# EAGLE board 3D printer Schematic (EAGLE 9.6.2)
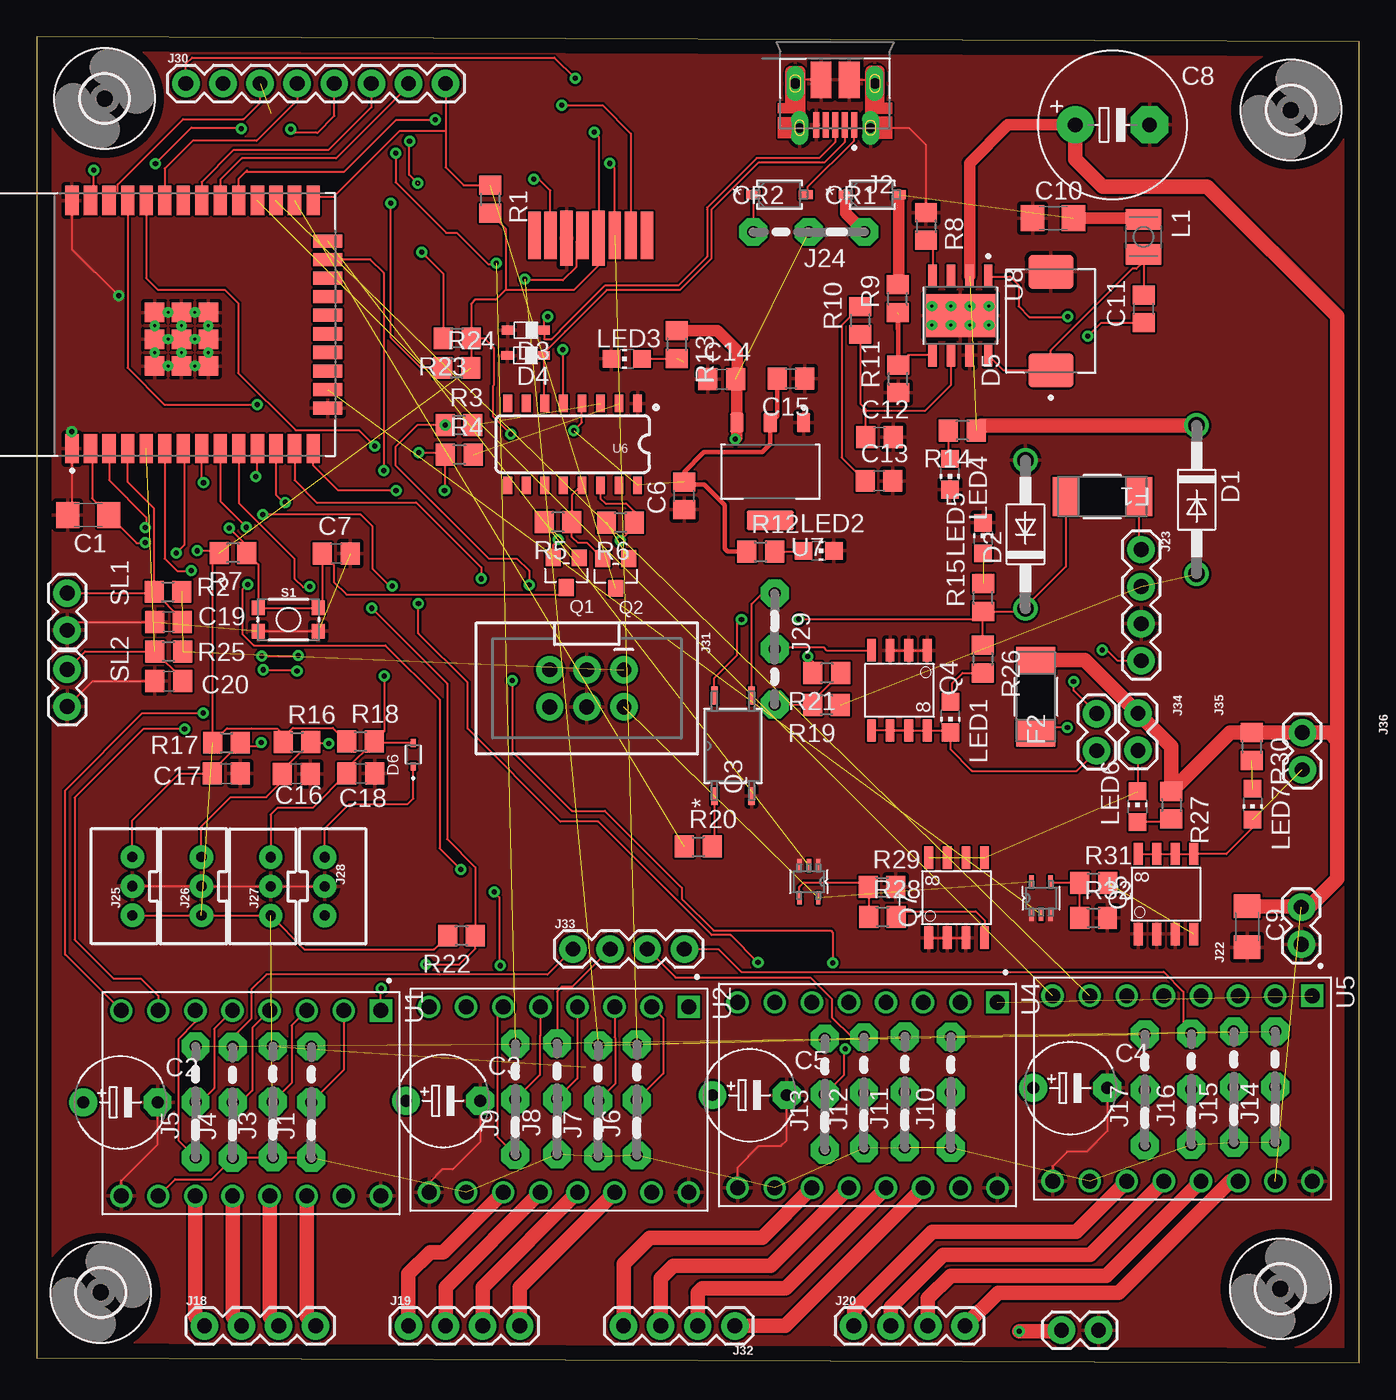
[diagram p0: board, top side]
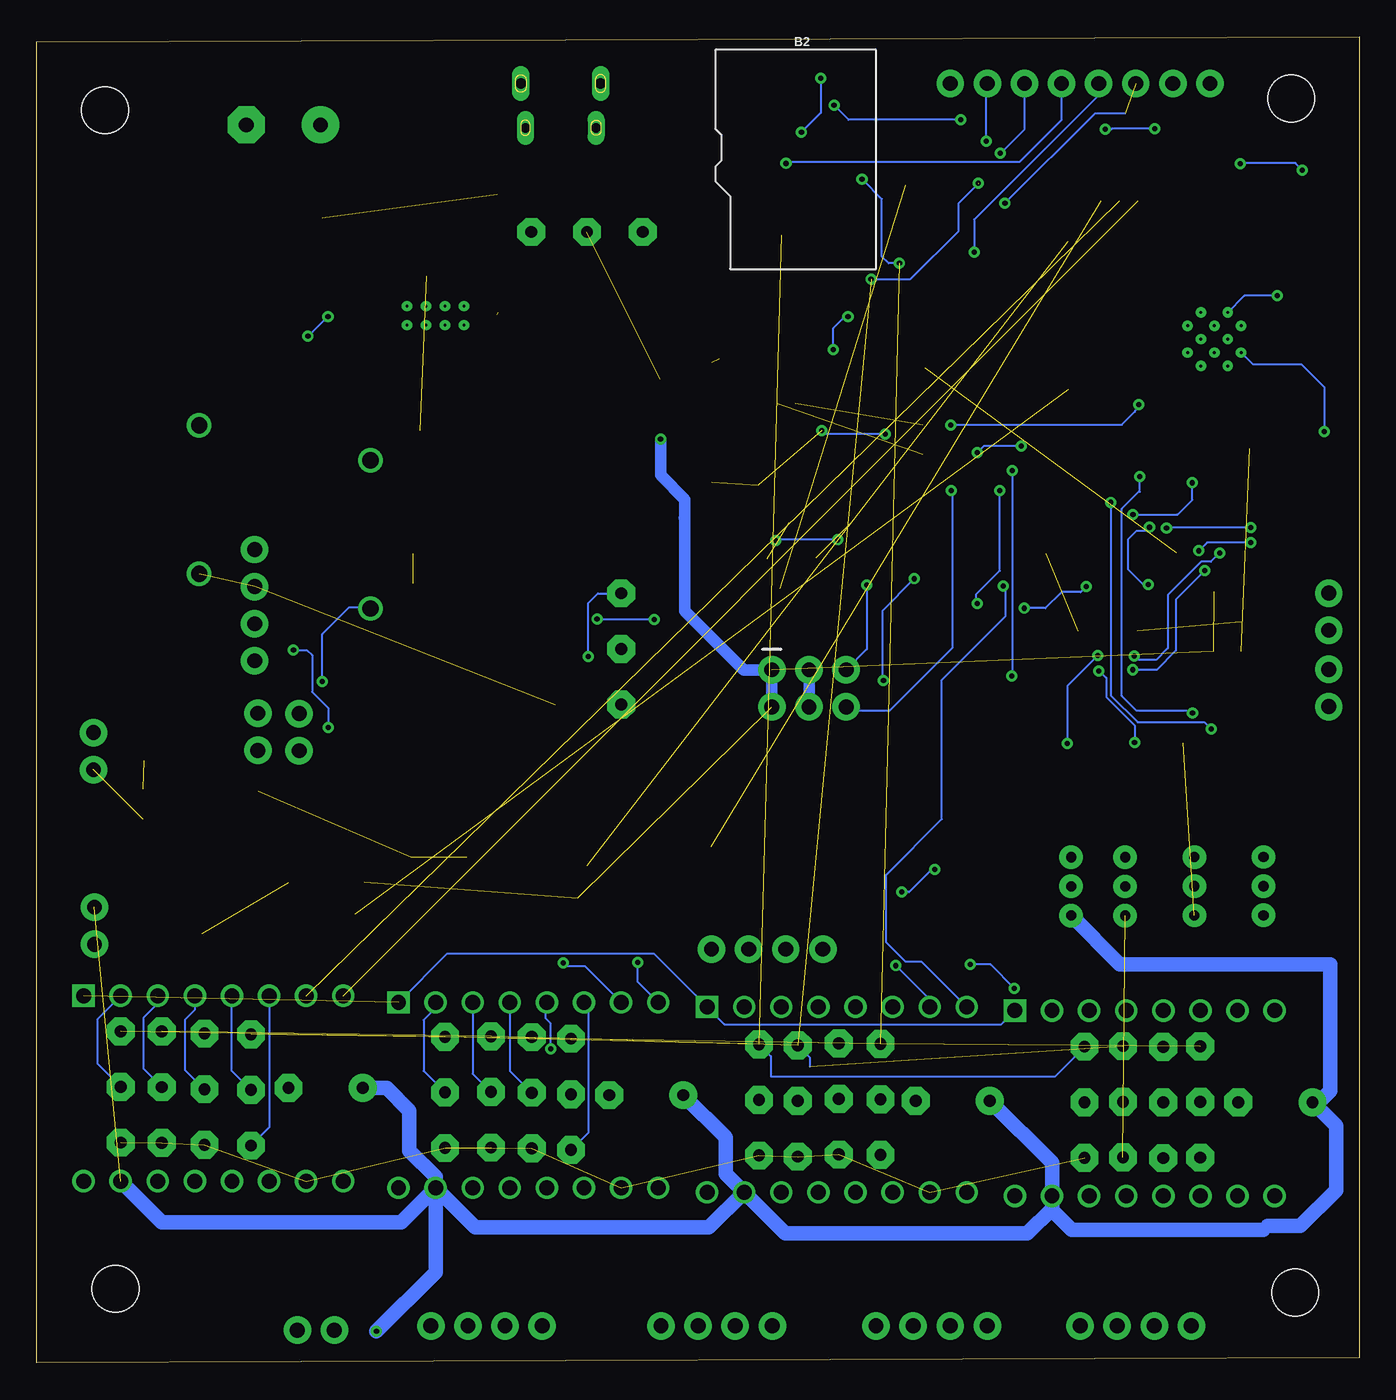
[diagram p1: board, bottom side, seen from below]

Size 90.57 x 90.85 mm. Coordinates in mm from the lower left corner, seen from the top.
Outline: 0,0.35 90.57,0 90.57,90.5 0,90.85 0,0.35
Copper layers (1*16): Top 0.035mm / dielectric 1.5mm / Bottom 0.035mm
Design rules "default": minimum track width 6mil, minimum drill 0.35mm, track to track 6mil, track to pad 6mil, pad to pad 6mil, via to via 6mil, smd to smd 6mil, copper to edge 40mil, drill to drill 6mil, minimum pad ring 10mil, minimum via ring 8mil, stop-mask expansion 4mil, vias tented up to drill 0mil, thermal gap 10mil

## Footprints (pad centres in the part's own frame; a part is rotated, then mirrored left to right if it is on the bottom)
DCK5_TEX = smd 0.851 x 0.305: 1 -1.124,0.65; 2 -1.124,0; 3 -1.124,-0.65; 4 1.124,-0.65; 5 1.124,0.65
MICRO-SDCARD = smd 0.85 x 3.25 bottom: CD/DAT3 -2.52,-5.32; CLK 0.78,-5.32; CMD -1.42,-5.32; DAT0 2.98,-5.32; DAT1 4.08,-5.32; DAT2 -3.62,-5.32 | smd 0.85 x 3.75 bottom: GND 1.88,-5.52; VCC -0.32,-5.52
C1206 = smd 1.6 x 1.8: 1 -1.4,0; 2 1.4,0
E5-6 = drill 0.813 pad 1.905: + -2.54,0 | drill 0.813 pad 1.905 octagon: - 2.54,0
C0805 = smd 1.3 x 1.5: 1 -0.95,0; 2 0.95,0
E5-10,5 = drill 1.016 pad 2.54: + -2.54,0 | drill 1.016 pad 2.54 octagon: - 2.54,0
CR_19WLC_LTO = smd 0.965 x 0.61: 1 -1.803,0; 2 1.803,0
DO41-10 = drill 1.118: A 5.08,0; C -5.08,0
SOD323 = smd 0.8 x 0.6: A 1.25,0; C -1.25,0
DIOM6959X245N = smd 2.33 x 3.07: A 3.365,0; C -3.365,0
SODFL1608X70N = smd 0.53 x 0.4: A 0.8,0; C -0.8,0
0453SERIES_LTF = smd 1.803 x 2.692: 1 -2.502,0; 2 2.502,0
3,2 = hole 3.2: 0,0
04C = drill 0.813 pad 1.905 octagon: 1 -1.905,0; 2 1.905,0; 3 5.715,0
AMPHENOL_10103594-0001LF = smd 0.4 x 1.75: 1 -1.3,2.825; 2 -0.65,2.825; 3 0,2.825; 4 0.65,2.825; 5 1.3,2.825 | drill 0.65 pad 0.73 long: 6 -2.425,3.03; 7 2.425,3.03 | drill 0.7 pad 1.2 long: 8 -2.725,0; 9 2.725,0 | smd 1.05 x 2.1 bottom: 10 -2.425,3.03; 11 2.425,3.03 | smd 1.425 x 2.5: S1 -0.963,-0.25; S2 0.963,-0.25
1X04 = drill 1.016 pad 1.88: 1 0,0; 2 2.54,0; 3 5.08,0; 4 7.62,0
1X02 = drill 1.016 pad 1.88: 1 0,0; 2 2.54,0
JST-3-PTH-VERT = drill 0.7 pad 1.6: 1 -2,-0.55; 2 0,-0.55; 3 2,-0.55
1X08 = drill 1.016 pad 1.88: 1 0,0; 2 2.54,0; 3 5.08,0; 4 7.62,0; 5 10.16,0; 6 12.7,0; 7 15.24,0; 8 17.78,0
2X3-SHROUDED = drill 1.016 pad 1.88: 1 -1.27,2.54; 2 1.27,2.54; 3 -1.27,0; 4 1.27,0; 5 -1.27,-2.54; 6 1.27,-2.54
L2825P = smd 1.4 x 2.4: 1 -1.2,0; 2 1.2,0
CHIP-LED0805 = smd 1.2 x 1.2: A 0,-1.05; C 0,1.05
SOT-23 = smd 1.016 x 1.143: 1 -0.889,-1.016; 2 0.889,-1.016; 3 0,1.016
4PIN_SO6_TOS = smd 1.219 x 0.457: 1 -3.442,1.27; 3 -3.442,-1.27; 4 3.442,-1.27; 6 3.442,1.27
SO-8 = smd 1.524 x 0.61: 1 -2.743,1.905; 2 -2.743,0.635; 3 -2.743,-0.635; 4 -2.743,-1.905; 5 2.743,-1.905; 6 2.743,-0.635; 7 2.743,0.635; 8 2.743,1.905
R0805 = smd 1.3 x 1.5: 1 -0.95,0; 2 0.95,0
TACTILE_SWITCH_SMD_4.6X2.8MM = smd 0.9 x 1: 1 -2.05,-0.8; 2 2.05,-0.8; 3 2.05,0.8; 4 -2.05,0.8
MODULE_A4988_STEPPER_MOTOR_DRIVER_CARRIER = drill 1.02 square: 1 -6.35,8.89 | drill 1.02: 2 -6.35,6.35; 3 -6.35,3.81; 4 -6.35,1.27; 5 -6.35,-1.27; 6 -6.35,-3.81; 7 -6.35,-6.35; 8 -6.35,-8.89; 9 6.35,-8.89; 10 6.35,-6.35; 11 6.35,-3.81; 12 6.35,-1.27; 13 6.35,1.27; 14 6.35,3.81; 15 6.35,6.35; 16 6.35,8.89
MODULE_ESP32-WROOM-32D = smd 2 x 0.9: 1 -8.5,5.26; 2 -8.5,3.99; 3 -8.5,2.72; 4 -8.5,1.45; 5 -8.5,0.18; 6 -8.5,-1.09; 7 -8.5,-2.36; 8 -8.5,-3.63; 9 -8.5,-4.9; 10 -8.5,-6.17; 11 -8.5,-7.44; 12 -8.5,-8.71; 13 -8.5,-9.98; 14 -8.5,-11.25; 25 8.5,-11.25; 26 8.5,-9.98; 27 8.5,-8.71; 28 8.5,-7.44; 29 8.5,-6.17; 30 8.5,-4.9; 31 8.5,-3.63; 32 8.5,-2.36; 33 8.5,-1.09; 34 8.5,0.18; 35 8.5,1.45; 36 8.5,2.72; 37 8.5,3.99; 38 8.5,5.26 | smd 0.9 x 2: 15 -5.715,-12.25; 16 -4.445,-12.25; 17 -3.175,-12.25; 18 -1.905,-12.25; 19 -0.635,-12.25; 20 0.635,-12.25; 21 1.905,-12.25; 22 3.175,-12.25; 23 4.445,-12.25; 24 5.715,-12.25 | smd 1.33 x 1.33: 39_1 -2.835,-0.405; 39_2 -1,-0.405; 39_3 0.835,-0.405; 39_4 -2.835,-2.24; 39_5 -1,-2.24; 39_6 0.835,-2.24; 39_7 -2.835,-4.075; 39_8 -1,-4.075; 39_9 0.835,-4.075 | drill 0.2 pad 0.3: 39_10 -1.917,-0.405; 39_11 -0.083,-0.405; 39_12 -2.835,-1.323; 39_13 -1,-1.323; 39_14 0.835,-1.323; 39_15 -1.917,-2.24; 39_16 -0.083,-2.24; 39_17 -2.835,-3.158; 39_18 -1,-3.158; 39_19 0.835,-3.158; 39_20 -1.917,-4.075; 39_21 -0.083,-4.075
SO016 = smd 0.6 x 1.2: 1 -4.445,-2.8; 2 -3.175,-2.8; 3 -1.905,-2.8; 4 -0.635,-2.8; 5 0.635,-2.8; 6 1.905,-2.8; 7 3.175,-2.8; 8 4.445,-2.8; 9 4.445,2.8; 10 3.175,2.8; 11 1.905,2.8; 12 0.635,2.8; 13 -0.635,2.8; 14 -1.905,2.8; 15 -3.175,2.8; 16 -4.445,2.8
SOT229P700X180-4N = smd 0.93 x 1.31: 1 -2.29,-3.345; 2 0,-3.345; 3 2.29,-3.345 | smd 3.24 x 1.31: 4 0,3.345
VREG_LM5017MR/NOPB = smd 1.55 x 0.6: 1 -2.7,1.905; 2 -2.7,0.635; 3 -2.7,-0.635; 4 -2.7,-1.905; 5 2.7,-1.905; 6 2.7,-0.635; 7 2.7,0.635; 8 2.7,1.905 | smd 2.95 x 4.9: 9 0,0 | drill 0.2 pad 0.3: 10 -0.65,1.95; 11 0.65,1.95; 12 -0.65,0.65; 13 0.65,0.65; 14 -0.65,-0.65; 15 0.65,-0.65; 16 -0.65,-1.95; 17 0.65,-1.95

## Placement (x,y rotation side)
A1  74LVC1G125DCKRG4  [DCK5_TEX]  52.87,32.97 270 top
A2  74LVC1G125DCKRG4  [DCK5_TEX]  68.78,31.84 90 top
B2  MICRO-SDCARD  [MICRO-SDCARD]  38.17,82.55 0 bottom
C1  100uF 6.3V  [C1206]  3.54,58.07 180 top
C2  100uF35V  [E5-6]  5.75,17.86 0 top
C3  100uF35V  [E5-6]  27.84,17.96 0 top
C4  100uF35V  [E5-6]  70.77,18.83 0 top
C5  100uF35V  [E5-6]  48.82,18.35 0 top
C6  10nF50V  [C0805]  44.33,59.39 90 top
C7  100uF25V  [C0805]  20.53,55.44 0 top
C8  100uF50V  [E5-10,5]  73.66,84.8 0 top
C9  4.7uF50V  [C1206]  82.88,29.88 270 top
C10  47uF16V  [C1206]  69.6,78.41 0 top
C11  100nF50V  [C0805]  75.8,72.19 90 top
C12  56pF50V  [C0805]  57.72,63.42 0 top
C13  820pF50V  [C0805]  57.69,60.42 0 top
C14  47uF6.3V  [C0805]  46.91,67.38 0 top
C15  47uF6.3V  [C0805]  51.66,67.42 180 top
C16  100nF25V  [C0805]  17.78,40.35 0 top
C17  100nF25V  [C0805]  12.99,40.37 0 top
C18  100nF25V  [C0805]  22.2,40.37 0 top
C19  22uF6.3V  [C0805]  9.04,50.76 0 top
C20  22uF6.3V  [C0805]  9.05,46.7 0 top
CR1  [CR_19WLC_LTO]  57.22,80.01 0 top
CR2  [CR_19WLC_LTO]  50.87,80.01 0 top
D1  1N4004  [DO41-10]  79.43,59.13 270 top
D2  1N4004  [DO41-10]  67.71,56.75 90 top
D3  PESD5V0S1BA  [SOD323]  33.5,70.74 180 top
D4  PESD5V0S1BA  [SOD323]  33.48,69.01 180 top
D5  B540C-13-F  [DIOM6959X245N]  69.45,71.36 90 top
D6  1N4148WT  [SODFL1608X70N]  25.79,41.66 90 top
F1  15A 2410  [0453SERIES_LTF]  72.97,59.33 180 top
F2  30A 3912  [0453SERIES_LTF]  68.42,45.64 90 top
H1  MOUNT-HOLE3.2  [3,2]  4.66,86.6 0 top
H2  MOUNT-HOLE3.2  [3,2]  4.4,4.83 0 top
H3  MOUNT-HOLE3.2  [3,2]  85.16,5.08 0 top
H4  MOUNT-HOLE3.2  [3,2]  85.88,85.81 0 top
J1  [04C]  18.81,15.96 90 top
J2  10103594-0001LF  [AMPHENOL_10103594-0001LF]  54.68,87.63 180 top
J3  [04C]  16.18,15.98 90 top
J4  [04C]  13.43,15.94 90 top
J5  [04C]  10.89,15.98 90 top
J6  [04C]  41.1,16.11 90 top
J7  [04C]  38.46,16.04 90 top
J8  [04C]  35.64,16.18 90 top
J9  [04C]  32.79,16.15 90 top
J10  [04C]  62.6,16.63 90 top
J11  [04C]  59.45,16.66 90 top
J12  [04C]  56.65,16.61 90 top
J13  [04C]  53.97,16.5 90 top
J14  [04C]  84.81,17 90 top
J15  [04C]  81.98,16.99 90 top
J16  [04C]  79.07,16.85 90 top
J17  [04C]  75.88,16.8 90 top
J18  [1X04]  11.5,2.54 0 top
J19  [1X04]  25.47,2.54 0 top
J20  [1X04]  55.95,2.54 0 top
J21  Fan_case  [1X02]  72.71,2.24 180 top
J22  FAN_HEATSINK  [1X02]  86.6,28.68 90 top
J23  [1X04]  75.63,55.71 270 top
J24  [04C]  54.78,77.47 180 top
J25  [JST-3-PTH-VERT]  6.01,32.66 90 top
J26  [JST-3-PTH-VERT]  10.74,32.65 90 top
J27  [JST-3-PTH-VERT]  15.48,32.64 90 top
J28  [JST-3-PTH-VERT]  20.28,32.65 270 top
J29  [04C]  50.54,50.81 270 top
J30  [1X08]  10.23,87.63 0 top
J31  [2X3-SHROUDED]  37.68,46.2 270 top
J32  Z_Motor  [1X04]  47.81,2.54 180 top
J33  CS_PINS  [1X04]  36.73,28.35 0 top
J34  BED  [1X02]  72.58,44.48 270 top
J35  E0  [1X02]  75.41,44.5 270 top
J36  PART_FAN  [1X02]  86.66,43.17 270 top
L1  4.7uH4.5A  [L2825P]  75.79,77.13 270 top
LED1  LED_BED  [CHIP-LED0805]  62.57,44.23 180 top
LED2  LED_3V  [CHIP-LED0805]  53.55,55.63 270 top
LED3  LED_5V  [CHIP-LED0805]  40.4,68.77 90 top
LED4  LED_VIN  [CHIP-LED0805]  62.53,60.87 180 top
LED5  LED_VBED  [CHIP-LED0805]  64.81,56.49 0 top
LED6  LED_E0  [CHIP-LED0805]  75.38,38.1 0 top
LED7  LED_FAN  [CHIP-LED0805]  83.26,38.27 180 top
Q1  SMD-TRANSISTOR-NPN-50V-100MA(SOT-23)  [SOT-23]  36.28,54.13 180 top
Q2  SMD-TRANSISTOR-NPN-50V-100MA(SOT-23)  [SOT-23]  39.66,54.07 180 top
Q3  TLP182(E  [4PIN_SO6_TOS]  47.68,42.27 90 top
Q4  FDS5680  [SO-8]  59.07,46.07 270 top
Q5  FDS5680  [SO-8]  77.33,32.12 90 top
Q7  FDS5680  [SO-8]  63,31.87 90 top
R1  10K  [R0805]  31.06,79.71 270 top
R2  4.7K  [R0805]  9,52.82 0 top
R3  0R  [R0805]  28.92,64.24 0 top
R4  0R  [R0805]  28.94,62.23 0 top
R5  12K  [R0805]  35.71,57.59 180 top
R6  12K  [R0805]  39.97,57.55 180 top
R7  12K  [R0805]  13.45,55.48 180 top
R8  73.2K  [R0805]  60.9,77.84 270 top
R9  60.4K  [R0805]  58.96,72.9 90 top
R10  23.7K  [R0805]  56.4,71.4 90 top
R11  11.5K  [R0805]  58.99,67.4 90 top
R12  73.2K  [R0805]  49.58,55.57 0 top
R13  73.2K  [R0805]  43.83,69.76 270 top
R14  73.2K  [R0805]  63.39,63.87 180 top
R15  73.2K  [R0805]  64.81,52.42 90 top
R16  10K  [R0805]  17.83,42.53 0 top
R17  10K  [R0805]  13.01,42.48 0 top
R18  10K  [R0805]  22.17,42.58 0 top
R19  1K  [R0805]  54.09,45.06 180 top
R20  330R  [R0805]  45.31,35.37 0 top
R21  1K  [R0805]  54.11,47.26 180 top
R22  10K  [R0805]  29.09,29.27 180 top
R23  10K  [R0805]  28.8,70.18 180 top
R24  10K  [R0805]  28.76,68.15 0 top
R25  4.7K  [R0805]  9.05,48.74 0 top
R26  2.2K  [R0805]  64.78,48.21 270 top
R27  2.2K  [R0805]  77.7,38.2 270 top
R28  10R  [R0805]  57.91,30.56 0 top
R29  100K  [R0805]  57.89,32.6 0 top
R30  2.2K  [R0805]  83.19,42.22 270 top
R31  10R  [R0805]  72.38,32.89 0 top
R32  100K  [R0805]  72.37,30.49 0 top
S1  [TACTILE_SWITCH_SMD_4.6X2.8MM]  17.24,50.92 0 top
SL1  T_E0  [1X02]  2.09,52.72 270 top
SL2  T_BED  [1X02]  2.09,47.5 270 top
U1  A4988_STEPPER_MOTOR_DRIVER_CARRIER  [MODULE_A4988_STEPPER_MOTOR_DRIVER_CARRIER]  14.69,17.79 270 top
U2  A4988_STEPPER_MOTOR_DRIVER_CARRIER  [MODULE_A4988_STEPPER_MOTOR_DRIVER_CARRIER]  35.77,18.04 270 top
U3  ESP32-WROOM-32D  [MODULE_ESP32-WROOM-32D]  7.69,71.12 90 top
U4  A4988_STEPPER_MOTOR_DRIVER_CARRIER  [MODULE_A4988_STEPPER_MOTOR_DRIVER_CARRIER]  56.89,18.34 270 top
U5  A4988_STEPPER_MOTOR_DRIVER_CARRIER  [MODULE_A4988_STEPPER_MOTOR_DRIVER_CARRIER]  78.45,18.8 270 top
U6  CH340C  [SO016]  36.71,62.92 180 top
U7  AMS1117-3.3  [SOT229P700X180-4N]  50.23,61.05 180 top
U8  TPS54340DDA  [VREG_LM5017MR/NOPB]  63.25,71.73 270 top

## Library data of the parts
A1 A2 = 74LVC1G125DCKRG4; AVAILABILITY: In Stock; DESCRIPTION: Single Bus Buffer Gate With 3-State Outputs 5-SC70 -40 to 125; MF: Texas Instruments; MP: 74LVC1G125DCKRG4; PACKAGE: SOT-SC70-5 Texas Instruments; PRICE: None; PURCHASE-URL: https://pricing.snapeda.com/search/part/74LVC1G125DCKRG4/?ref=eda
B2 = SparkFun-Boards
C1-C20 = rcl; SPICEPREFIX: C
CR1 CR2 = 1N5819WLCCR_19WLC_LTO-L; COPYRIGHT: Copyright (C) 2021 Ultra Librarian. All rights reserved.; MANUFACTURER_PART_NUMBER: 1N5819WLC; MFR_NAME: LITE-ON
D1 D2 = diode
D3 D4 = PESD5V0S1BA; AVAILABILITY: Not in stock; DESCRIPTION: DIODE ESD PROTECT SOD323; MF: NXP Semiconductors; MP: PESD5V0S1BA; PACKAGE: None; PRICE: None
D5 = B540C-13-F; AVAILABILITY: In Stock; DESCRIPTION: Diode Schottky 40V 5A Surface Mount SMC; MF: Diodes Inc.; MP: B540C-13-F; PACKAGE: DO-214 Diodes Inc.; PRICE: None; PURCHASE-URL: https://pricing.snapeda.com/search/part/B540C-13-F/?ref=eda
D6 = 1N4148WT; AVAILABILITY: In Stock; DESCRIPTION: 1N4148WT Series 75 V 300 mA High Conductance Fast Switching Diode - SOD-523F; MF: ON Semiconductor; MP: 1N4148WT; PACKAGE: SOD-523-2 ON Semiconductor; PRICE: None; PURCHASE-URL: https://pricing.snapeda.com/search/part/1N4148WT/?ref=eda
F1 F2 = littlefuse_0453015; COPYRIGHT: Copyright (C) 2021 Ultra Librarian. All rights reserved.; MANUFACTURER_PART_NUMBER: 0453015.MR; MFR_NAME: Littelfuse Inc
H1-H4 = holes
J1 J3-J17 J24 J29 = jumper
J2 = 10103594-0001LF; AVAILABILITY: Good; DESCRIPTION: USB - micro B USB 2.0 Receptacle Connector 5 Position Surface Mount, Right Angle; Through Hole; MF: Amphenol ICC (FCI); MP: 10103594-0001LF; PACKAGE: None; PRICE: None; PURCHASE-URL: https://pricing.snapeda.com/search/part/10103594-0001LF/?ref=eda
J18-J20 J23 J32 J33 = SparkFun-Connectors; PROD_ID: CONN-09696
J21 J22 J34-J36 SL1 SL2 = SparkFun-Connectors
J25-J28 = SparkFun-Connectors; PROD_ID: CONN-13230
J30 = SparkFun-Connectors; PROD_ID: CONN-08438
J31 = SparkFun-Connectors; PROD_ID: CONN-10681; SF_ID: PRT_10877
L1 = rcl; SPICEPREFIX: L
LED1-LED7 = led
Q1 Q2 = SMD-TRANSISTOR-NPN-50V-100MA_SOT-23_; AVAILABILITY: No availability data; DESCRIPTION: Transistor Diode; MF: Microdiode Electronics; MP: S9014-J6; PACKAGE: None; PRICE: None
Q3 = 1N5819WLCCR_19WLC_LTO-L; COPYRIGHT: Copyright (C) 2021 Ultra Librarian. All rights reserved.; MANUFACTURER_PART_NUMBER: TLP182(E; MFR_NAME: Toshiba Electronic Devices & Storage Co.
Q4 Q5 Q7 = transistor-fet
R1-R32 = rcl; SPICEPREFIX: R
S1 = SparkFun-Switches; PROD_ID: SWCH-13065
U1 U2 U4 U5 = A4988_STEPPER_MOTOR_DRIVER_CARRIER; AVAILABILITY: No availability data; DESCRIPTION: Stepper Motor Driver; MF: Pololu; MP: A4988 STEPPER MOTOR DRIVER CARRIER; PACKAGE: None; PRICE: None
U3 = ESP32-WROOM-32D; AVAILABILITY: In Stock; DESCRIPTION: Bluetooth, WiFi 802.11b/g/n, Bluetooth v4.2 +EDR, Class 1, 2 and 3 Transceiver Module 2.4GHz ~ 2.5GHz Integrated; MF: Espressif Systems; MP: ESP32-WROOM-32D; PACKAGE: Module Espressif Systems; PRICE: None; PURCHASE-URL: https://pricing.snapeda.com/search/part/ESP32-WROOM-32D/?ref=eda
U6 = CH340C; AVAILABILITY: No availability data; DESCRIPTION: USB to serial chip CH340; MF: WCH; MP: CH340C; PACKAGE: Package; PRICE: None
U7 = AMS1117-3.3; AVAILABILITY: No availability data; DESCRIPTION: LDO Voltage Regulators 800MA LDO LINEAR REG; MF: AMD; MP: AMS1117-3.3; PACKAGE: None; PRICE: None
U8 = TPS54340DDA; AVAILABILITY: In Stock; DESCRIPTION: 42 V Input, 3.5 A, Step-Down DC/DC Converter with Eco-mode&trade; 8-SO PowerPAD -40 to 125; MF: Texas Instruments; MP: TPS54340DDA; PACKAGE: HSOIC-8 Texas Instruments; PRICE: None; PURCHASE-URL: https://pricing.snapeda.com/search/part/TPS54340DDA/?ref=eda

## Nets
0: D1.A J23.2 R19.1
3.3V: B2.VCC C1.1 C6.2 C15.2 J1.1 J3.1 J4.1 J6.1 J7.1 J8.1 J10.1 J11.1 J12.1 J14.1 J15.1 J16.1 J25.1 J26.1 J27.1 J30.1 R1.2 R7.2 R12.1 R16.1 R17.1 R18.1 R22.2 R23.1 R24.2 U1.10 U2.10 U3.2 U4.10 U5.10 U6.4 U6.16 U7.2
5V1: C10.2 CR1.2 L1.1 R9.2
+5V: A1.5 A2.5 C14.2 J24.2 J31.1 J31.2 R2.2 R13.1 R25.2 U7.3
COMP: C12.1 R10.1 U8.6
D_N: D4.C J2.2 U6.6
D_P: D3.C J2.3 U6.5
DTR: Q2.2 R5.1 U6.13
E0_CS: J16.3 J33.4
E0_DIR_PIN: U3.28 U5.8
E0_MS1: J14.2 U5.2
E0_MS2: J15.2 U5.3
E0_MS3: J16.2 U5.4
E0_RST: J17.2 U5.5
E0_SLP: J17.1 U5.6
E0_STEP_PIN: U3.27 U5.7
EN: C7.1 Q1.3 R7.1 S1.3 S1.4 U3.3
FAN_E0_PIN: A2.2 U3.16
FB: R9.1 R11.2 U8.5
GND: A1.1 A1.3 A2.1 A2.3 B2.GND C1.2 C2.- C3.- C4.- C5.- C6.1 C7.2 C8.- C9.2 C10.1 C12.2 C13.2 C14.1 C15.1 C16.2 C17.2 C18.2 C19.1 C20.1 D2.A D3.A D4.A D5.A J2.5 J2.6 J2.7 J2.8 J2.9 J2.10 J2.11 J2.S1 J2.S2 J21.1 J22.1 J23.3 J25.2 J26.2 J27.2 J28.2 J31.3 J31.4 LED2.C LED3.C LED4.C LED5.C Q3.3 Q4.1 Q4.2 Q4.3 Q5.1 Q5.2 Q5.3 Q7.1 Q7.2 Q7.3 R8.1 R11.1 R29.2 R32.2 S1.1 S1.2 SL1.2 SL2.2 U1.9 U1.16 U2.9 U2.16 U3.1 U3.15 U3.38 U3.39_1 U3.39_2 U3.39_3 U3.39_4 U3.39_5 U3.39_6 U3.39_7 U3.39_8 U3.39_9 U3.39_10 U3.39_11 U3.39_12 U3.39_13 U3.39_14 U3.39_15 U3.39_16 U3.39_17 U3.39_18 U3.39_19 U3.39_20 U3.39_21 U4.9 U4.16 U5.9 U5.16 U6.1 U7.1 U8.7 U8.9
HEATER_BED_PIN: R20.1 U3.26
HEATER_E0_PIN: A1.2 U3.24
IO0: J30.8 Q2.3 R1.1 U3.25
MISO: B2.DAT0 J5.3 J9.3 J13.3 J17.3 J30.6 U3.31
MOSI: B2.CMD J1.3 J6.3 J10.3 J14.3 J30.5 U3.37
MOTOR_EN_PIN: R22.1 U1.1 U2.1 U3.10 U4.1 U5.1
N$1: J36.2 LED7.C Q5.5 Q5.6 Q5.7 Q5.8
N$2: LED7.A R30.2
N$3: J18.1 U1.11
N$4: J18.2 U1.12
N$5: J18.3 U1.13
N$6: J18.4 U1.14
N$7: Q1.1 R5.2
N$10: Q2.1 R6.2
N$11: F1.1 J23.1
N$12: F2.1 J23.4
N$13: LED2.A R12.2
N$14: R3.2 U6.3
N$15: R4.2 U6.2
N$16: R8.2 U8.4
N$17: LED3.A R13.2
N$18: C13.1 R10.2
N$19: C11.1 U8.1
N$20: C11.2 D5.C L1.2 U8.8
N$21: LED4.A R14.2
N$22: J19.1 U2.11
N$23: J19.2 U2.12
N$24: J19.3 U2.13
N$25: J19.4 U2.14
N$26: J20.1 U5.11
N$27: J20.2 U5.12
N$28: J20.3 U5.13
N$29: J20.4 U5.14
N$30: LED5.A R15.2
N$31: CR1.1 J24.1
N$32: CR2.1 J24.3
N$36: D6.C J28.1
N$37: Q3.1 R20.2
N$39: Q5.4 R31.2
N$40: J29.1 Q3.4 R21.2
N$41: LED1.A R26.2
N$42: J29.3 R19.2 R21.1
N$43: J34.2 LED1.C Q4.5 Q4.6 Q4.7 Q4.8
N$44: LED6.A R27.2
N$45: J35.2 LED6.C Q7.5 Q7.6 Q7.7 Q7.8
N$46: Q7.4 R28.2
RTS: Q1.2 R6.1 U6.14
SCK: B2.CLK J3.3 J7.3 J11.3 J15.3 J30.7 U3.30
SCL: J30.3 R24.1 U3.36
SDA: J30.4 R23.2 U3.33
SS: B2.CD/DAT3 U3.29
TEMP_BED_PIN: C20.2 R25.1 SL2.1 U3.5
TEMP_E0_PIN: C19.2 R2.1 SL1.1 U3.4
TO_FAN_E0: A2.4 R31.1 R32.1
TO_HEATER_BED: J29.2 Q4.4
TO_HEATER_E0: A1.4 R28.1 R29.1
UART+: J31.5 R3.1 U3.35
UART-: J31.6 R4.1 U3.34
VBED: D2.C F1.2 J34.1 Q3.6 R15.1 R26.1
VIN: C2.+ C3.+ C4.+ C5.+ C8.+ C9.1 D1.C F2.2 J21.2 J22.2 J28.3 J35.1 J36.1 R14.1 R27.1 R30.1 U1.15 U2.15 U4.15 U5.15 U8.2
VUSB: CR2.2 J2.1
X_CS: J4.3 J33.1
X_DIR_PIN: U1.8 U3.11
X_MIN: C17.1 J25.3 R17.2 U3.6
X_MS1: J1.2 U1.2
X_MS2: J3.2 U1.3
X_MS3: J4.2 U1.4
X_RST: J5.2 U1.5
X_SLP: J5.1 U1.6
X_STEP_PIN: U1.7 U3.12
Y_CS: J8.3 J33.2
Y_DIR_PIN: U2.8 U3.8
Y_MIN: C16.1 J26.3 R16.2 U3.7
Y_MS1: J6.2 U2.2
Y_MS2: J7.2 U2.3
Y_MS3: J8.2 U2.4
Y_RST: J9.2 U2.5
Y_SLP: J9.1 U2.6
Y_STEP_PIN: U2.7 U3.9
Z_1A: J32.4 U4.11
Z_1B: J32.3 U4.12
Z_2A: J32.2 U4.13
Z_2B: J32.1 U4.14
Z_CS: J12.3 J33.3
Z_DIR_PIN: U3.14 U4.8
Z_MIN: C18.1 D6.A J27.3 R18.2 U3.23
Z_MS1: J10.2 U4.2
Z_MS2: J11.2 U4.3
Z_MS3: J12.2 U4.4
Z_RST: J13.2 U4.5
Z_SLP: J13.1 U4.6
Z_STEP_PIN: U3.13 U4.7

## Tracks (layer width: path | path; a pad name or v marks a point on that pad's centre or on a via)
0  (2 unrouted)
3.3V  (via drill 0.35)  (17 unrouted)
  Top 0.152: J30.1 10.23,88.97 10.66,89.41 35.46,89.41 v36.87,87.99 | v38.19,84.3 38.49,84 38.49,77.22 | 38.49,77.22 B2.VCC | R1.2 32.13,77.69 32.13,73.5 | 32.13,73.5 32.15,73.53 36.82,73.53 38.49,75.2 38.49,77.21 38.49,77.22 | 32.13,73.5 31.43,72.81 30.01,72.81 29.75,72.55 R23.1 | R23.1 30.66,70.18 31.3,69.54 31.3,66.96 31.25,66.91 31.25,64.84 v32.46,63.62 | v36.79,63.87 37.34,64.42 U6.4 | v7.44,56.2 7.46,56.2 7.51,56.15 6.86,56.15 C1.1 3.8,59.21 3.8,62.52 U3.2 | v10.99,55.63 12.35,55.63 R7.2 12.06,55.04 R17.1 13.04,43.46 14.7,43.46 14.71,43.46 16.49,43.46 16.88,43.06 R16.1 16.88,42.85 17.54,43.51 20.29,43.51 R18.1 | 11.39,30.66 J25.1 11.34,30.66 11.35,30.65 | 11.39,30.66 16.01,30.66 J27.1 18.33,28.34 27.22,28.34 R22.2 | J26.1 11.35,30.65 | 11.35,30.65 11.39,30.65 11.39,30.66 | U1.10 9.49,12.59 11.99,12.59 J4.1 13.48,14.08 J3.1 18.78,14.08 J1.1 | R23.1 29.75,68.19 R24.2
  Top 0.3: C15.2 50.71,64.87 U7.2 50.23,62.92 49.69,62.37 45.7,62.37 44.33,61.01 C6.2 44.51,60.17 45.72,60.17 47.12,58.77 47.12,55.77 47.31,55.57 R12.1
  Bottom 0.152: v36.87,87.99 36.87,85.62 v38.19,84.3 | v32.46,63.62 36.55,63.62 v36.79,63.87 | v7.44,56.2 10.42,56.2 v10.99,55.63
5V1  (1 unrouted)
  Top 0.8: C10.2 75.71,78.41 L1.1 | CR1.2 59.02,73.91 R9.2
+5V  (via drill 0.35)  (5 unrouted)
  Top 0.8: 47.93,67.27 47.86,67.33 C14.2 | 47.93,67.27 47.93,64.42 U7.3 47.94,63.39 v47.84,63.29 | R13.1 46.61,70.7 47.97,69.34 47.97,67.31 47.93,67.27
  Bottom 0.8: v47.84,63.29 47.84,60.8 46.18,59.14 46.18,57.89 | 46.18,57.89 46.21,57.86 | 46.18,57.89 46.18,51.5 42.16,47.47 J31.1 J31.2
COMP
  Top 0.152: R10.1 56.4,65.71 56.77,65.34 56.77,65.22 | C12.1 56.77,65.22 | 56.77,65.22 60.83,65.22 62.62,67.01 U8.6
D_N
  Top 0.152: J2.2 55.33,83.62 53.92,82.22 49.43,82.22 46.21,79 46.21,75.77 | 46.21,75.77 | 46.21,75.77 46.21,75.65 44.05,73.48 39.04,73.48 36.19,70.64 34.73,69.17 D4.C 34.73,65.8 U6.6
D_P  (via drill 0.35)
  Top 0.152: J2.3 54.68,83.62 53.58,82.53 49.43,82.53 | 49.43,82.53 | 49.43,82.53 49.3,82.53 45.91,79.13 45.91,79 | 45.91,79 | 45.91,79 45.91,75.77 43.92,73.79 38.91,73.79 35.81,70.69 35.26,70.14 34.75,70.14 D3.C 34.74,70.73 34.74,71.52 34.77,71.54 34.89,71.65 v35.01,71.65 | U6.5 36.07,69.34 v36.02,69.4
  Bottom 0.152: v36.02,69.4 36.02,70.88 35.22,71.68 35.03,71.68 v35.01,71.65
DTR
  Top 0.152: U6.13 36.66,59.44 R5.1 36.66,56.58 37.08,56.16 37.7,56.16 Q2.2
E0_CS
  Top 0.152: J33.4 46.69,28.35 48.25,26.79 77.16,26.79 78.53,25.43 78.53,23.1 J16.3
E0_DIR_PIN  (1 unrouted)
E0_MS1
  Bottom 0.152: U5.2 86.41,23.55 86.41,20.5 J14.2
E0_MS2
  Bottom 0.152: U5.3 82.26,24.62 83.25,23.63 83.25,20.17 J15.2
E0_MS3
  Bottom 0.152: U5.4 79.72,24.2 80.4,23.52 80.4,20.09 J16.2
E0_RST
  Bottom 0.152: J17.2 77.18,20 U5.5
E0_SLP
  Bottom 0.152: U5.6 74.64,16.13 J17.1
E0_STEP_PIN  (1 unrouted)
EN  (via drill 0.35)
  Top 0.152: R7.1 | R7.1 15.19,54.69 S1.4 S1.3 19.58,52 C7.1 20.36,54.67 20.36,53.48 21.22,52.62 35.78,52.62 Q1.3 | U3.3 4.97,60.47 7.52,57.91 7.52,57.21 v7.44,57.21 | v13.2,57.19 14.41,55.98 R7.1
  Bottom 0.152: v7.44,57.21 13.17,57.21 v13.19,57.19 v13.2,57.19
FAN_E0_PIN  (1 unrouted)
FB  (1 unrouted)
  Top 0.152: U8.5 59.67,69.03 R11.2
  Top 0.3: 58.95,70.81 58.94,71.93 R9.1 | 59.02,71.78 58.99,71.78 R11.2
GND  (via drill 0.35)  (2 unrouted)
  Top 0.152: Q4.3 Q4.2 Q4.1 | Q7.1 Q7.2 Q7.3 | SL1.2 2.67,50.76 C19.1 | SL2.2 3.83,46.7 C20.1 | S1.1 S1.2 | J25.2 11.28,32.66 J26.2 16.02,32.65 J27.2 J28.2 | J2.S2 52.2,87.88 J2.9 | J2.S1 57.15,87.88 J2.8 | J2.10 59.73,84.6 60.9,83.43 R8.1 | U1.9 5.8,12.48 8.29,14.97 C2.- | C3.- 30.38,15.14 28.48,13.25 27.79,13.25 26.88,12.33 U2.9 | U4.9 48,13.4 49.46,14.86 50.96,14.86 51.36,15.26 C5.- | C4.- 73.31,15.89 71.9,14.47 70.56,14.47 69.56,13.48 U5.9 | U3.38 2.43,76.29 v5.63,73.09 | v2.41,63.78 2.41,62.63 U3.1 2.43,58.35 C1.2
  Bottom 0.152: v5.63,73.09 7.87,73.09 U3.39_14 | U3.39_10 7.29,68.4 3.96,68.4 2.41,66.85 v2.41,63.78
  Bottom 0.8: J31.3 J31.4
  pour Top: 0.07,90.97 0.07,-0.23 0.53,-0.7 88.99,-0.7 91.31,1.62 91.31,89.58 90.38,90.51 0.53,90.51 0.07,90.97
HEATER_BED_PIN  (1 unrouted)
HEATER_E0_PIN  (1 unrouted)
IO0  (1 unrouted)
  Top 0.152: J30.8 28.01,84.39 | 28.01,84.39 28.01,81.89 29.24,80.66 R1.1 | U3.25 19.2,79.89 20.36,79.89 24.86,84.39 28.01,84.39
MISO  (via drill 0.35)  (4 unrouted)
  Top 0.152: J30.6 22.93,86 20,83.08 13.5,83.08 11.3,80.88 11.3,79.63 U3.31 | B2.DAT0 35.19,80.29 34.39,81.08 v34.05,81.08 | v24.58,82.87 24.58,80.86 28.05,77.4 28.78,77.4 30.92,75.26 31.42,75.26 v31.48,75.33
  Bottom 0.152: J30.6 22.93,84.48 24.58,82.82 v24.58,82.87 | v31.48,75.33 32.23,75.33 32.68,75.78 32.68,79.72 v34.05,81.08
MOSI  (via drill 0.35)  (3 unrouted)
  Top 0.152: U3.37 3.91,79.83 v3.91,81.7 | v8.14,82.14 10.61,84.6 13.93,84.6 v14,84.53 | v17.4,84.5 17.65,84.25 19.19,84.25 19.2,84.23 20.39,85.41 J30.5 | B2.CMD 39.59,81.83 v39.25,82.16
  Bottom 0.152: v3.91,81.7 4.38,82.18 8.1,82.18 v8.14,82.14 | v14,84.53 16.95,84.53 16.98,84.5 v17.4,84.5 | v39.25,82.16 39.09,82.16 38.98,82.26 23.26,82.26 20.39,85.14 J30.5 | J6.3 40.28,21.01 40.28,19.63 20.83,19.63 18.81,21.65 J1.3
MOTOR_EN_PIN  (via drill 0.35)  (1 unrouted)
  Top 0.152: U1.1 23.58,25.62 v23.61,25.66 | v26.65,27.29 28.96,27.29 30.04,28.37 R22.1 30.04,33.95 28.11,35.88 28.11,46.52 v22.95,51.69 | U3.10 13.86,58.88 17.65,55.09 17.65,53.73 18.26,53.13 18.69,53.13 v18.69,53.17
  Bottom 0.152: U4.1 62.44,28.04 48.31,28.04 U2.1 43.47,23.2 24.51,23.2 U1.1 | v23.61,25.66 25.25,27.29 v26.65,27.29 | v18.69,53.17 19.08,52.79 20.39,52.79 21.49,51.69 v22.95,51.69
N$1  (1 unrouted)
  Top 0.152: LED7.C 83.27,36.67 81.46,34.86 Q5.5 Q5.6 Q5.7 Q5.8
N$2  (1 unrouted)
N$3
  Top 1: U1.11 10.88,3.16 J18.1
N$4
  Top 1: U1.12 13.42,3.16 J18.2
N$5
  Top 1: U1.13 15.96,3.16 J18.3
N$6
  Top 1: U1.14 18.5,3.16 J18.4
N$7  (1 unrouted)
N$10  (1 unrouted)
N$11
  Top 0.152: F1.1 75.47,55.88 J23.1
N$12  (via drill 0.35)
  Top 0.152: J23.4 74.02,48.09 73.29,48.83 v72.97,48.83 | v70.58,43.51 68.79,43.51 F2.1
  Bottom 0.152: v72.97,48.83 72.05,48.83 71.69,48.47 71.69,45.96 70.58,44.85 v70.58,43.51
N$13
  Top 0.152: R12.2 52.44,55.57 LED2.A
N$14  (1 unrouted)
N$15  (1 unrouted)
N$16
  Top 0.152: 61.36,76.44 U8.4
  Top 0.3: R8.2 61.36,76.44
N$17  (1 unrouted)
  Top 0.152: LED3.A 44.11,68.77 44.32,68.56
N$18
  Top 0.152: R10.2 55.13,71.08 55.13,62.02 C13.1
N$19  (via drill 0.35)
  Top 0.152: U8.1 65.17,74.41 66.66,74.41 67.24,73.83 67.24,72.37 67.97,71.64 70.57,71.64 v70.61,71.68 | v71.98,70.32 72.9,71.24 C11.1
  Bottom 0.152: v70.61,71.68 71.96,70.32 v71.98,70.32
N$20
  Top 0.152: U8.8 66.19,68 D5.C 69.45,69.37 75.03,74.95 75.3,74.95 75.77,75.41 75.77,75.86 75.81,75.91 76.11,75.91 76.08,75.93 L1.2 75.79,73.15 C11.2
N$21
  Top 0.152: R14.2 62.44,62.01
  Top 0.3: 62.44,62.01 LED4.A
N$22
  Top 1: U2.11 27.86,7.59 26.95,7.59 25.47,6.1 J19.1
N$23
  Top 1: U2.12 28.01,5.2 J19.2
N$24
  Top 1: U2.13 30.55,5.2 J19.3
N$25
  Top 1: U2.14 33.09,5.2 J19.4
N$26
  Top 1: U5.11 71.18,8.99 61.33,8.99 55.98,3.64 55.98,2.58 J20.1
N$27
  Top 1: J20.2 58.49,3.81 62.07,7.39 72.13,7.39 U5.12
N$28
  Top 1: U5.13 73.25,5.97 62.58,5.97 61.03,4.42 J20.3
N$29
  Top 1: J20.4 65.85,4.82 74.1,4.82 81.73,12.45 U5.14
N$30  (1 unrouted)
N$31
  Top 0.8: CR1.1 55.41,78.74 J24.1
N$32
  Top 0.152: CR2.1 J24.3
N$36
  Top 0.152: J28.1 19.73,36.6 21.4,38.27 25.41,38.27 25.79,38.65 D6.C
N$37
  Top 0.152: Q3.1 46.41,35.52 R20.2
N$39  (1 unrouted)
N$40  (via drill 0.35)
  Top 0.152: R21.2 53.16,48.03 v52.8,48.39 | Q3.4 48.95,51.99 49.67,52.71 J29.1
  Bottom 0.152: v52.8,48.39 52.8,52.05 52.13,52.71 J29.1
N$41
  Top 0.152: LED1.A 62.71,45.43 62.71,46.57 63.41,47.26 R26.2
N$42
  Top 0.152: J29.3 53.11,45.09 R19.2 53.14,45.34 R21.1
N$43
  Top 0.152: J34.2 71.2,40.56 64.05,40.56 62.57,42.04 LED1.C 62.42,43.33 Q4.8 Q4.6 | Q4.7 Q4.6 | Q4.6 Q4.5
N$44
  Top 0.152: R27.2 77.5,37.05 LED6.A
N$45  (4 unrouted)
  Top 0.152: J35.2 75.38,41.93 LED6.C
N$46
  Top 0.152: R28.2 59.24,30.93 64.29,30.93 64.9,30.32 Q7.4
RTS  (via drill 0.35)
  Top 0.152: U6.14 38.61,59.22 38.98,58.85 40.38,58.85 40.38,58.87 40.92,58.32 40.92,57.65 | 40.92,57.65 | 40.92,57.65 R6.1 40.92,57.3 v39.95,56.33 | Q1.2 35.39,56.05 v35.72,56.38
  Bottom 0.152: v35.72,56.38 39.88,56.38 39.94,56.33 v39.95,56.33
SCK  (via drill 0.35)  (5 unrouted)
  Top 0.152: J30.7 25.47,87.45 20.52,82.51 14.05,82.51 12.59,81.04 U3.30 | B2.CLK 36.94,76.78 36.94,75.06 36.04,74.16 33.46,74.16 33.43,74.19 v33.43,74.22 | v26.09,80.81 25.51,81.39 25.51,83.67 v25.53,83.68 v25.54,83.68
  Bottom 0.152: v33.43,74.22 30.75,74.22 27.44,77.53 27.44,79.42 26.08,80.78 | v25.54,83.68 25.54,87.56 J30.7 | J7.3 37.62,20.92 37.62,20.29
SCL  (via drill 0.35)  (1 unrouted)
  Top 0.152: U3.36 5.56,80.21 5.56,80.72 10.04,85.2 14.18,85.2 15.31,86.33 J30.3 | R24.1 26.35,68.15 24.26,70.24 v24.26,79.42
  Bottom 0.152: v24.26,79.42 18.09,85.59 16.03,85.59
SDA  (via drill 0.35)
  Top 0.152: J30.4 17.85,86.48 15.08,83.71 10.68,83.71 8.78,81.81 U3.33 | v26.37,76.07 27.85,74.59 R23.2
  Bottom 0.152: J30.4 17.85,86.84 26.37,78.32 v26.37,76.07
SS  (via drill 0.35)
  Top 0.152: U3.29 13.86,81.12 14.33,81.6 | 14.33,81.6 14.42,81.68 | 14.33,81.6 21.08,81.6 24.62,85.14 v27.3,85.14 | v35.96,86.14 38.75,86.14 40.69,84.21 B2.CD/DAT3
  Bottom 0.152: v27.3,85.14 34.96,85.14 v35.96,86.14
TEMP_BED_PIN  (1 unrouted)
  Top 0.152: SL2.1 3.33,48.74 R25.1 10,46.84 C20.2
TEMP_E0_PIN
  Top 0.152: SL1.1 7.95,52.72 R2.1 | R2.1 9.99,50.89 C19.2 | R2.1 8.05,58.53 6.24,60.34 U3.4
TO_FAN_E0
  Top 0.152: R32.1 71.42,32.88 R31.1 69.51,32.89 A2.4
TO_HEATER_BED
  Top 0.152: J29.2 50.63,49 53.92,49 54.1,48.81 Q4.4
TO_HEATER_E0
  Top 0.152: A1.4 52.22,32.6 52.53,32.91 56.63,32.91 R29.1 56.96,32.58 R28.1
UART+  (via drill 0.35)
  Top 0.152: R3.1 26.07,64.25 24.56,62.73 24.56,61.5 30.98,55.09 32.89,55.09 33.72,54.26 v33.72,53.29 | U3.35 6.24,68.16 8.74,65.65 v15.11,65.65
  Bottom 0.152: v33.72,53.29 33.72,48.89 J31.5 | v15.11,65.65 15.11,65.46 15.36,65.21 15.36,65.16 16.25,64.26 27.96,64.26 R3.1
  other vias: 27.97,64.24
UART-  (via drill 0.35)
  Top 0.152: v27.93,59.74 27.93,59.65 27.99,59.71 R4.1 27.88,62.34 v26.17,62.34 | U3.34 7.51,74.31 8.31,73.51 12.89,73.51 13.81,72.59 13.81,67.81 17.74,63.88 22.07,63.88 v23.15,62.8
  Bottom 0.152: J31.6 34.9,44.7 32.15,44.7 27.84,49.01 27.84,59.74 v27.93,59.74 | v26.17,62.34 25.71,62.8 v23.15,62.8
VBED  (via drill 0.35)
  Top 0.152: R26.1 64.78,51.27 | 64.78,51.27 64.78,51.44 R15.1 67.4,51.47 | 67.4,51.47 67.51,51.47 D2.C | F1.2 70.47,54.54 67.4,51.47 | J34.1 71,46.06 v71,46.68 | Q3.6 46.41,46.93 47.96,48.48 47.96,50.69 48.19,50.93 v48.27,50.93 | v52.19,50.95 64.46,50.95 64.78,51.27
  Bottom 0.152: v71,46.68 71,49.92 69.15,51.77 67.81,51.77 D2.C | v48.27,50.93 52.17,50.93 v52.19,50.95
VIN  (via drill 0.35)  (2 unrouted)
  Top 0.8: C8.+ 66.5,84.8 63.89,82.19 U8.2
  Top 1: R14.1 64.67,64.21 D1.C | F2.2 71.77,48.14 J35.1 77.7,42.21 R27.1 81.72,43.17 R30.1 J36.1 88.53,43.17 89.05,42.65 | J21.2 70.1,2.17 v67.29,2.17 | 89.05,42.65 89.05,33.14 87.13,31.22 | 87.13,31.22 J22.2 | C9.1 87.07,31.28 87.13,31.22 | C8.+ 71.12,82.44 72.99,80.57 80.17,80.57 89.05,71.69 89.05,42.65
  Bottom 1: v67.29,2.17 63.24,6.22 U4.15 | C3.+ 21.04,13.7 U1.15 | C5.+ 43.38,15.45 43.38,12.95 U2.15 | U4.15 63.24,12.74 65.04,14.54 65.04,17.27 66.6,18.83 C4.+ | C2.+ 2.98,17.63 | 2.98,17.63 1.58,16.23 1.58,11.84 4.03,9.39 6.29,9.39 6.57,9.11 19.71,9.11 21.04,10.44 U1.15 | U1.15 21.04,10.57 22.72,8.88 39.31,8.88 U2.15 | U2.15 44.52,9.28 60.52,9.28 U4.15 | U5.15 81.99,9.64 65.6,9.64 U4.15 | J28.3 16.39,27.31 1.98,27.31 1.98,18.64 2.98,17.63
VUSB
  Top 0.152: CR2.2 52.78,80.01 52.78,80.53 55.98,83.72 J2.1
X_CS
  Top 0.152: J33.1 34.99,26.61 27.64,26.61 27.62,26.63 15.75,26.63 14.72,25.6 14.72,23.58 13.43,22.29 J4.3
X_DIR_PIN  (via drill 0.35)
  Top 0.152: U1.8 1.95,27.98 1.95,39.21 7.25,44.51 v11.42,44.51 | v15.02,60.72 15.13,60.82 U3.11
  Bottom 0.152: v11.42,44.51 11.58,44.66 15.23,44.66 16.25,45.69 16.25,58.51 15.09,59.67 15.02,59.67 v15.02,60.72
X_MIN  (via drill 0.35)
  Top 0.152: J25.3 6.56,37.16 9.77,40.37 C17.1 12.04,40.56 13.69,42.22 | R17.2 13.69,42.22 | U3.6 8.78,55.09 9.62,54.24 10.46,54.24 10.54,54.32 v10.59,54.27 | v15.52,47.48 17.83,47.48 v17.83,47.39 | v15.39,42.49 15.44,42.49 15.16,42.22 13.69,42.22
  Bottom 0.152: v10.59,54.27 12.56,52.29 12.56,48.8 13.88,47.48 v15.52,47.48 | v17.83,47.39 17.79,47.39 17.32,46.92 17.32,45.61 15.39,43.67 v15.39,42.49
X_MS1
  Top 0.152: U1.2 21.04,20.09 J1.2
X_MS2
  Top 0.152: U1.3 17.47,23.11 17.47,19.18 J3.2
X_MS3
  Top 0.152: U1.4 14.79,22.96 14.79,18.66 13.97,17.84 J4.2
X_RST
  Top 0.152: U1.5 12.15,22.87 12.15,18.82 11.22,17.88 J5.2
X_SLP
  Top 0.152: U1.6 10.88,23.35 9.71,22.18 9.71,15.25 J5.1
X_STEP_PIN  (via drill 0.35)
  Top 0.152: U3.12 16.4,59.46 16.91,58.95 v17.02,58.95 | v10.13,43.42 7.29,43.42 2.61,38.73 2.61,28.99 5.26,26.34 7.15,26.34 8.34,25.15 U1.7
  Bottom 0.152: v10.13,43.42 10.62,43.9 15.19,43.9 17.02,45.73 v17.02,58.95
Y_CS
  Top 0.152: J33.2 36.69,25.77 35.96,25.77 35.64,25.45 J8.3
Y_DIR_PIN  (via drill 0.35)
  Top 0.152: v24.37,53.22 24.34,53.19 24.2,53.19 23.01,54.38 23.01,57.29 22.19,58.12 v15.5,58.12 | v11.43,60.29 11.32,60.4 U3.8
  Bottom 0.152: U2.8 29.97,27.48 31.06,27.48 32.39,28.82 32.39,33.43 28.58,37.24 28.58,46.79 24.24,51.12 24.24,53.1 v24.37,53.22 | v15.5,58.12 12.43,58.12 11.43,59.11 v11.43,60.29
Y_MIN  (via drill 0.35)
  Top 0.152: J26.3 11.29,36.73 13.31,38.75 15.73,38.75 16.83,39.85 C16.1 16.83,40.57 R16.2 18.87,42.44 v20,42.44 | U3.7 10.11,62.56 10.11,56.02 v9.56,55.48 | v15.42,48.41 17.87,48.41 v17.92,48.46
  Bottom 0.152: v9.56,55.48 10.16,54.88 10.84,54.88 13.11,52.6 13.11,48.97 13.91,48.16 15.17,48.16 v15.42,48.41 | v17.92,48.46 20,46.38 v20,42.44
Y_MS1
  Top 0.152: U2.2 42.91,23.59 42.91,19.82 J6.2
Y_MS2
  Top 0.152: U2.3 39.58,22.31 39.64,22.25 39.64,19.13 J7.2
Y_MS3
  Top 0.152: U2.4 37.04,19.49 J8.2
Y_RST
  Top 0.152: U2.5 34.5,22.43 34.46,22.39 34.46,19.73 J9.2
Y_SLP
  Top 0.152: J9.1 31.56,15.47 31.56,23.99 U2.6
Y_STEP_PIN  (via drill 0.35)
  Top 0.152: U3.9 12.59,59.02 v14.37,57.24 | v14.45,53.32 14.09,52.96 14.09,49.94 14.89,49.15 23.89,49.15 27.6,45.43 27.6,35.26 v29.06,33.8 | v31.33,32.26 31.69,31.89 31.69,27.44 31.83,27.31 v31.74,27.22
  Bottom 0.152: v14.37,57.24 14.61,57 15.24,57 15.85,56.39 15.85,54.38 14.8,53.32 v14.45,53.32 | v29.06,33.8 29.28,33.8 30.83,32.26 v31.33,32.26 | v31.74,27.22 29.42,24.89 U2.7
Z_1A
  Top 1: U4.11 49.68,8.59 41.99,8.59 40.19,6.79 J32.4
Z_1B
  Top 1: U4.12 50.28,6.65 43.58,6.65 42.73,5.8 J32.3
Z_2A
  Top 1: U4.13 51.29,5.12 45.57,5.12 45.27,4.82 J32.2
Z_2B
  Top 1: U4.14 51.25,2.54 J32.1
Z_CS
  Top 0.152: J33.3 43.76,26.4 52.98,26.4 54.46,24.93 54.46,23.67 55.8,22.32 J12.3
Z_DIR_PIN  (via drill 0.35)
  Top 0.152: v49.39,27.43 47.52,29.31 46.23,29.31 38.45,37.09 35.87,37.09 29.51,43.45 29.51,46.62 26.15,49.98 v26.15,52.01 | v24.61,59.76 20.65,59.76 18.94,61.47 U3.14
  Bottom 0.152: U4.8 49.39,26.09 v49.39,27.43 | v26.15,52.01 26.2,52.01 26.25,52.06 26.25,52.63 24.61,54.26 v24.61,59.76
Z_MIN  (via drill 0.35)
  Top 0.152: J27.3 16.03,37.57 16.49,38.02 18.9,38.02 C18.1 21.25,40.71 R18.2 | D6.A 23.24,42.46 R18.2 | U3.23 22.86,75.57 23.76,74.67 v23.76,61.13 | v23.8,47.05 23.8,43.25 R18.2
  Bottom 0.152: v23.76,61.13 23.76,47.09 v23.8,47.05
Z_MS1
  Bottom 0.152: U4.2 63.24,24.31 64.07,23.49 64.07,20 J10.2
Z_MS2
  Bottom 0.152: U4.3 60.7,19.82 J11.2
Z_MS3
  Bottom 0.152: U4.4 58.16,20.02 J12.2
Z_RST  (via drill 0.35)
  Top 0.152: J13.2 55.3,19.73 55.3,21.81 55.37,21.74 v55.37,21.51
  Bottom 0.152: v55.37,21.51 55.37,23.26 55.7,23.59 55.7,24.62 U4.5
Z_SLP
  Bottom 0.152: J13.1 52.77,15.79 52.77,24.39 U4.6
Z_STEP_PIN  (via drill 0.35)
  Top 0.152: U3.13 17.67,60.47 19.18,58.95 25.99,58.95 30.46,54.48 v30.46,53.71 | v32.58,46.75 32.58,41.89 36.64,37.82 38.91,37.82 44.18,32.54 44.18,31.79 46.35,29.62 54.37,29.62 54.51,29.47 v54.51,27.41
  Bottom 0.152: U4.7 53.03,27.18 54.28,27.18 v54.51,27.41 | v30.46,53.71 32.66,51.51 32.66,46.83 v32.58,46.75